# Altium PCB ewctrl-mini.pcbdoc
Units mil, origin at the board's own origin, x right, y up, seen from the top; angles counter-clockwise.
Board outline 5144.27 x 3985.28 mil, 2 copper layers (Top Layer, Bottom Layer); 67 components, 58 nets, 189 pads, 136 vias.
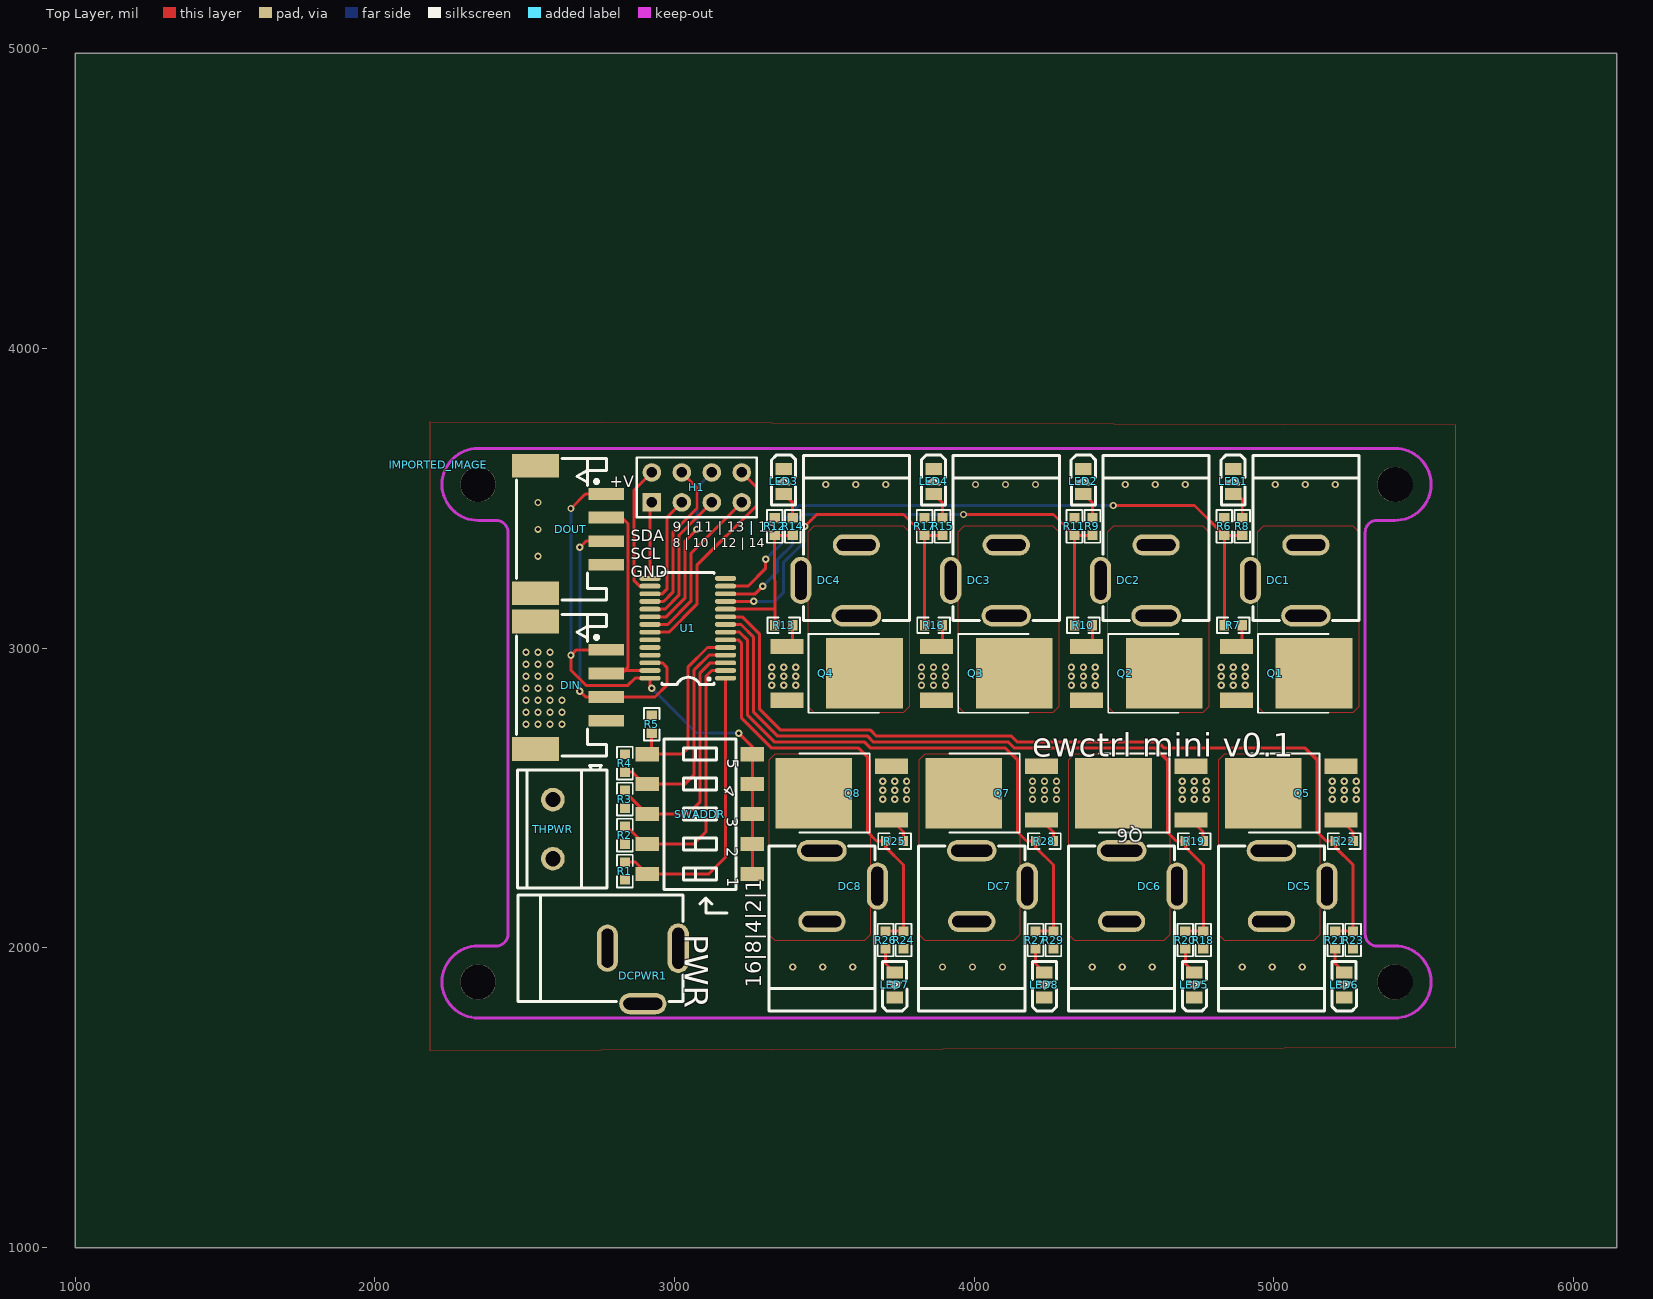
[diagram p0: Top Layer view]
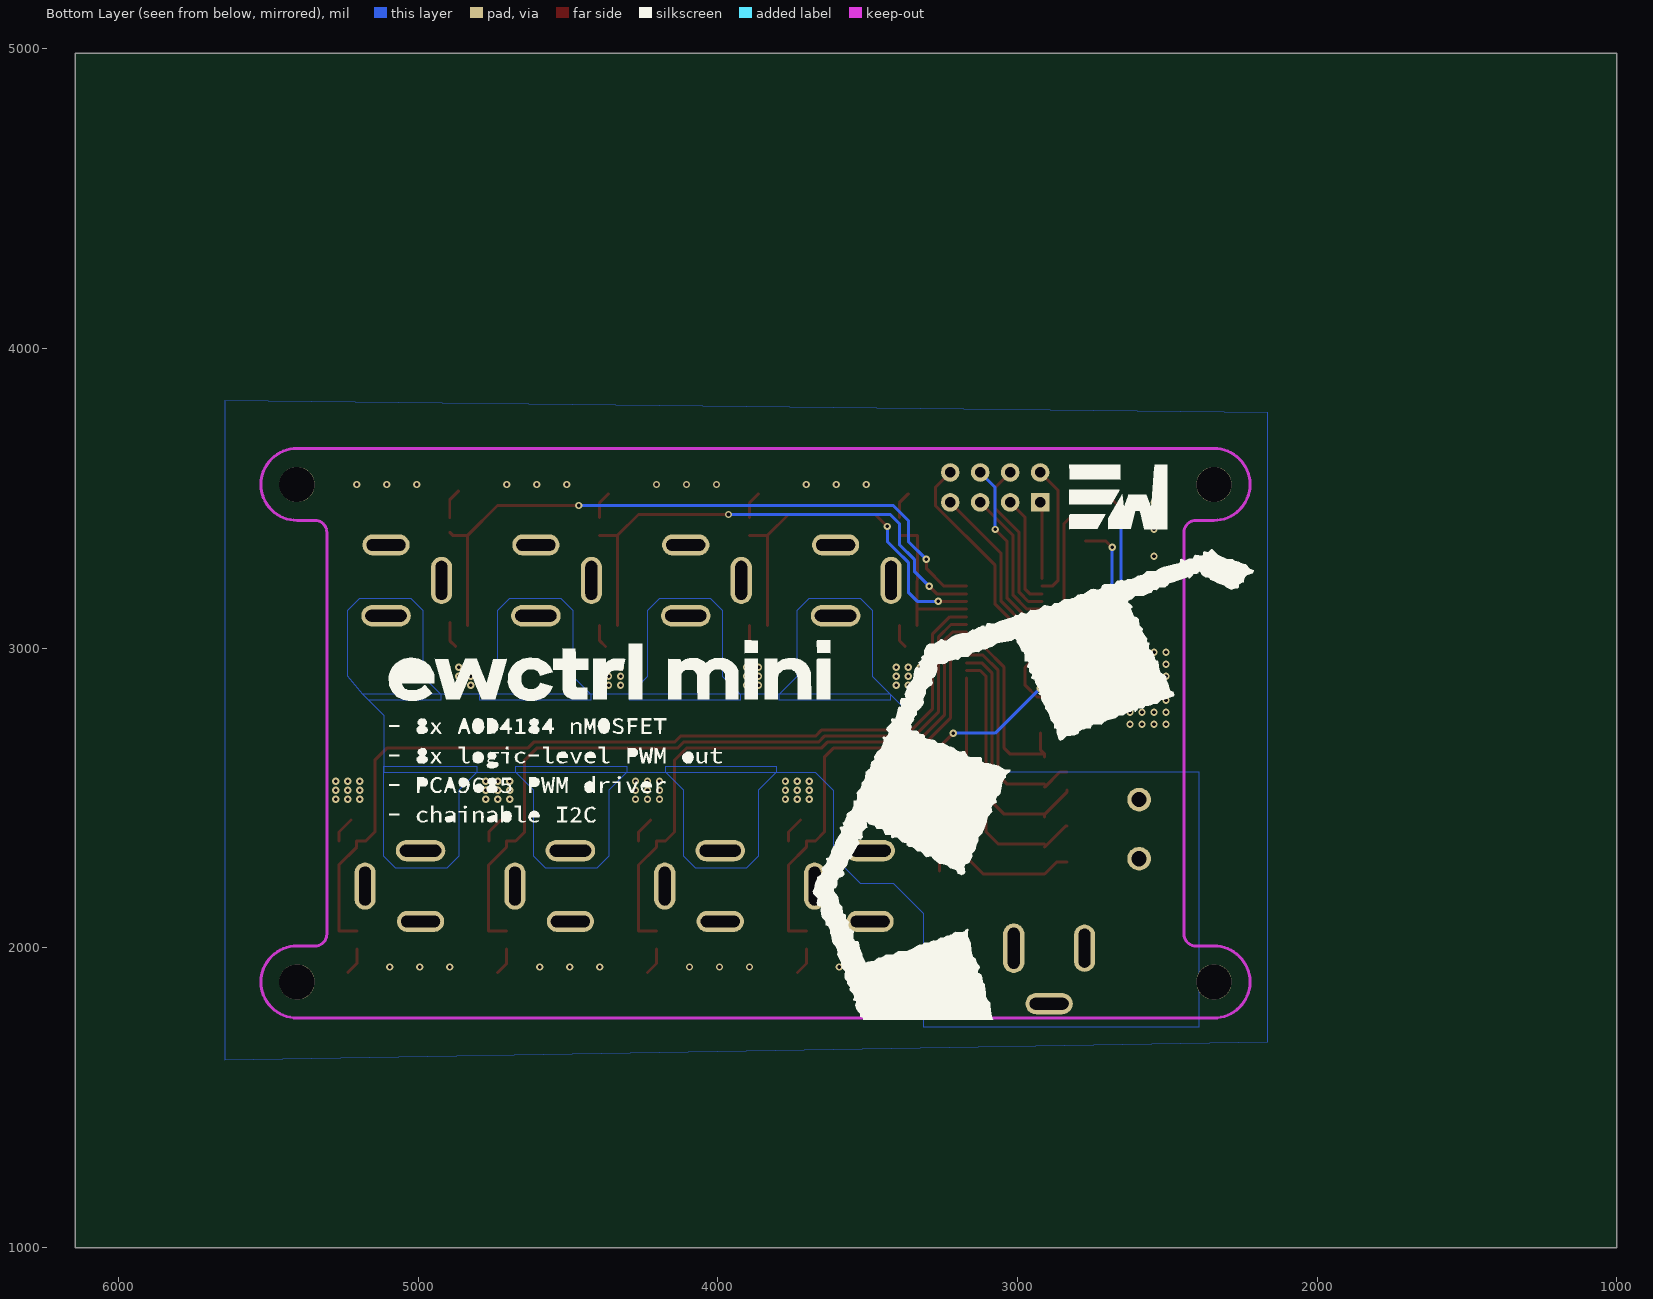
[diagram p1: Bottom Layer view, seen from below]

## Layer stack, top to bottom
Top Layer: signal copper (thickness not stored)
Dielectric: dielectric 12.6, FR-4, Dk 4.8
Bottom Layer: signal copper (thickness not stored)

## Board outline
6144.27,1000 1000,1000 1000,4985.28 6144.27,4985.28

## Components (designator, comment, footprint, x,y, rotation, side; value= is the part's Value field where it differs from the comment)
DC1 "DC-005-5A-2.0" DC-IN-TH_DC-005-5A-2.0 5014.27,3226.07 r270 top
DC2 "DC-005-5A-2.0" DC-IN-TH_DC-005-5A-2.0 4514.27,3226.07 r270 top
DC3 "DC-005-5A-2.0" DC-IN-TH_DC-005-5A-2.0 4014.28,3226.07 r270 top
DC4 "DC-005-5A-2.0" DC-IN-TH_DC-005-5A-2.0 3514.28,3226.07 r270 top
DC5 "DC-005-5A-2.0" DC-IN-TH_DC-005-5A-2.0 5084.27,2206.07 r90 top
DC6 "DC-005-5A-2.0" DC-IN-TH_DC-005-5A-2.0 4584.27,2206.07 r90 top
DC7 "DC-005-5A-2.0" DC-IN-TH_DC-005-5A-2.0 4084.27,2206.07 r90 top
DC8 "DC-005-5A-2.0" DC-IN-TH_DC-005-5A-2.0 3584.28,2206.07 r90 top
DCPWR1 "DC-005-5A-2.0" DC-IN-TH_DC-005-5A-2.0 2894.28,1906.07 r0 top
DIN "S4B-PH-SM4-K-TB(LF)(SN)" CONN-SMD_S4B-PH-SM4-K-TB-LF-SN 2654.28,2876.07 r90 top
DOUT "S4B-PH-SM4-K-TB(LF)(SN)" CONN-SMD_S4B-PH-SM4-K-TB-LF-SN 2654.28,3396.07 r90 top
H1 "HDR-F-2.54_2x4" HDR-F-2.54_2X4 3074.28,3536.07 r0 top
IMPORTED_IMAGE "IMPORTED_IMAGE" IMPORTED_IMAGE 2211.35,3611.05 r0 top
LED1 "whiteLEDSMD" LED0805-R-RD 4864.27,3556.07 r270 top
LED2 "whiteLEDSMD" LED0805-R-RD 4364.27,3556.07 r270 top
LED3 "whiteLEDSMD" LED0805-R-RD 3364.28,3556.07 r270 top
LED4 "whiteLEDSMD" LED0805-R-RD 3864.28,3556.07 r270 top
LED5 "whiteLEDSMD" LED0805-R-RD 4734.27,1876.08 r90 top
LED6 "whiteLEDSMD" LED0805-R-RD 5234.27,1876.08 r90 top
LED7 "whiteLEDSMD" LED0805-R-RD 3734.28,1876.08 r90 top
LED8 "whiteLEDSMD" LED0805-R-RD 4234.27,1876.08 r90 top
Q1 "AOD4184A" TO-252-2_L6.6-W6.1-P4.57-LS9.9-TL-CW 5004.27,2916.07 r0 top
Q2 "AOD4184A" TO-252-2_L6.6-W6.1-P4.57-LS9.9-TL-CW 4504.27,2916.07 r0 top
Q3 "AOD4184A" TO-252-2_L6.6-W6.1-P4.57-LS9.9-TL-CW 4004.28,2916.07 r0 top
Q4 "AOD4184A" TO-252-2_L6.6-W6.1-P4.57-LS9.9-TL-CW 3504.28,2916.07 r0 top
Q5 "AOD4184A" TO-252-2_L6.6-W6.1-P4.57-LS9.9-TL-CW 5094.27,2516.07 r180 top
Q6 "AOD4184A" TO-252-2_L6.6-W6.1-P4.57-LS9.9-TL-CW 4594.27,2516.07 r180 top
Q7 "AOD4184A" TO-252-2_L6.6-W6.1-P4.57-LS9.9-TL-CW 4094.27,2516.07 r180 top
Q8 "AOD4184A" TO-252-2_L6.6-W6.1-P4.57-LS9.9-TL-CW 3594.28,2516.07 r180 top
R1 "10kΩ" R0603 2834.28,2256.07 r270 top
R2 "10kΩ" R0603 2834.28,2376.07 r270 top
R3 "10kΩ" R0603 2834.28,2496.07 r270 top
R4 "10kΩ" R0603 2834.28,2616.07 r90 top
R5 "10kΩ" R0603 2924.28,2746.07 r90 top
R6 "10kΩ" R0603 4834.27,3406.07 r90 top
R7 "240Ω" R0603 4864.27,3076.07 r0 top
R8 "100Ω" R0603 4894.27,3406.07 r270 top
R9 "100Ω" R0603 4394.27,3406.07 r270 top
R10 "240Ω" R0603 4364.27,3076.07 r0 top
R11 "10kΩ" R0603 4334.27,3406.07 r90 top
R12 "10kΩ" R0603 3334.28,3406.07 r90 top
R13 "240Ω" R0603 3364.28,3076.07 r0 top
R14 "100Ω" R0603 3394.28,3406.07 r270 top
R15 "100Ω" R0603 3894.28,3406.07 r270 top
R16 "240Ω" R0603 3864.28,3076.07 r0 top
R17 "10kΩ" R0603 3834.28,3406.07 r90 top
R18 "10kΩ" R0603 4764.27,2026.08 r270 top
R19 "240Ω" R0603 4734.27,2356.07 r0 top
R20 "100Ω" R0603 4704.27,2026.08 r90 top
R21 "100Ω" R0603 5204.27,2026.08 r90 top
R22 "240Ω" R0603 5234.27,2356.07 r0 top
R23 "10kΩ" R0603 5264.27,2026.08 r270 top
R24 "10kΩ" R0603 3764.28,2026.08 r270 top
R25 "240Ω" R0603 3734.28,2356.07 r0 top
R26 "100Ω" R0603 3704.28,2026.08 r90 top
R27 "100Ω" R0603 4204.27,2026.08 r90 top
R28 "240Ω" R0603 4234.27,2356.07 r0 top
R29 "10kΩ" R0603 4264.27,2026.08 r270 top
SWADDR "DSIC05LS-P" SW-SMD_DSIC05LS-P 3084.28,2446.07 r90 top
THPWR "CONN-TH_2P-P5.00" CONN-TH_2P-P5.00 2594.28,2396.07 r270 top
U1 "-" TSSOP-28_L9.7-W4.4-P0.65-LS6.4-TL 3044.28,3066.07 r180 top
? "" ? 2166.57,3606.1 r0 top
? "" ? 2163.95,1826.1 r0 top
? "" ? 1973.14,2716.07 r0 top
? "" ? 3874.27,3927.17 r0 top
? "" ? 3874.28,4014.67 r0 top
? "" ? 2023.13,2716.07 r0 top

## Footprints (in the part's own frame and the unit in brackets; to place one, negate y for a bottom-side part, rotate by r counter-clockwise, add the part's x,y. Pads: shape width x height; smd on the part's side, far side on the other; paste and mask are expansions set on the pad)
CONN-SMD_S4B-PH-SM4-K-TB-LF-SN [mm]
  rect 1x3 smd paste+0 mask+0.051: 1(3.002,-3) 2(1,-3) 3(-1,-3) 4(-3,-3)
  rect 2x4 smd paste+0 mask+0.051: 5(-5.4,3) 6(5.4,3)
  silkscreen extent -6,-3 6,4.6
CONN-TH_2P-P5.00 [mm]
  round 2 hole 1.3 paste+0 mask+0.051: 1(-2.504,0) 2(2.504,0)
  silkscreen extent -5.4,-3 5,4.6
DC-IN-TH_DC-005-5A-2.0 [mm]
  oval 1.8x4.2 hole 1 slot 3.5 at 90 deg paste+0 mask+0.051: 1(3,2.352)
  oval 1.8x4 hole 1 slot 3.3 at 90 deg paste+0 mask+0.051: 2(-3,2.352)
  oval 4x1.8 hole 1 slot 3.3 at 0 deg paste+0 mask+0.051: 3(0,-2.352)
  silkscreen extent -10.6,-2.15 3.4,6.85
HDR-F-2.54_2X4 [mil]
  rect 62x62 hole 35 paste+0 mask+2: 1(-150,-50)
  round 62 hole 35 paste+0 mask+2: 2(-150,50) 3(-50,-50) 4(-50,50) 5(50,-50) 6(50,50) 7(150,-50) 8(150,50)
  silkscreen extent -200,-100 200,100
IMPORTED_IMAGE [mil]
LED0805-R-RD [mm]
  rect 1x1.4 smd paste+0 mask+0.051: 1(1.05,0) 2(-1.05,0)
  silkscreen extent -2.22,-1.04 1.99,1.01
R0603 [mil]
  rect 31.75x34.02 smd paste-3937.01 mask+2: 1(-29.65,0) 2(29.66,0)
  silkscreen extent -55,-26 55,26
SW-SMD_DSIC05LS-P [mm]
  rect 1.2x2 smd paste+0 mask+0.051: 1(-5.08,-4.45) 2(-2.54,-4.45) 3(0,-4.45) 4(2.54,-4.45) 5(5.08,-4.45) 6(5.08,4.45) 7(2.54,4.45) 8(0,4.45) 9(-2.54,4.45) 10(-5.08,4.45)
  silkscreen extent -6.37,-3.05 6.38,3.05
TO-252-2_L6.6-W6.1-P4.57-LS9.9-TL-CW [mm]
  rect 2.8x1.3 smd paste+0 mask+0.051: 1(-3.292,2.273) 3(-3.292,-2.273)
  rect 6.5x6 smd paste+0 mask+0.051: 2(3.292,0)
  silkscreen extent -1.46,-3.35 4.51,3.34
TSSOP-28_L9.7-W4.4-P0.65-LS6.4-TL [mil]
  oval 71x16 smd paste+0 mask+2: 1(-125.98,166.35) 2(-125.98,140.76) 3(-125.98,115.16) 4(-125.98,89.57) 5(-125.98,63.97) 6(-125.98,38.39) 7(-125.98,12.8) 8(-125.98,-12.8) 9(-125.98,-38.38) 10(-125.98,-63.97) 11(-125.98,-89.57) 12(-125.98,-115.15) 13(-125.98,-140.74) 14(-125.98,-166.34) 15(125.98,-166.34) 16(125.98,-140.74) 17(125.98,-115.15) 18(125.98,-89.57) 19(125.98,-63.97) 20(125.98,-38.38) 21(125.98,-12.8) 22(125.98,12.8) 23(125.98,38.39) 24(125.98,63.97) 25(125.98,89.57) 26(125.98,115.16) 27(125.98,140.74) 28(125.98,166.34)
  silkscreen extent -87,-187 87,187
? [mil]

## Free pads (board coordinates)
  round 118.11 hole 118.11 unplated paste+0: ""(2344.28,1886.08) ""(2344.28,3546.07) ""(5404.27,1886.08) ""(5404.27,3546.07)

## Via types
v1: diameter 24.41, hole 12.2, Top Layer to Bottom Layer, tented both sides, 136 vias

## Nets (pads, with @x,y where several pads share a name; then routed paths per layer and width w, separated by ;. In a path a pad name is that pad's centre, name@x,y a point inside that pad or via, vN(x,y) a via of type N, cw(c..) or ccw(c..) an arc to the next point about the centre after c; other vN are vias at no path point)
-OUT0: DC1.2 Q1.2
-OUT1: DC2.2 Q2.2
-OUT2: DC3.2 Q3.2
-OUT3: DC4.2 Q4.2
-OUT4: DC5.2 Q5.2
-OUT5: DC6.2 Q6.2
-OUT6: DC7.2 Q7.2
-OUT7: DC8.2 Q8.2
A0: R1.1 SWADDR.10 U1.1 | length 973.3
  Top Layer w10: R1.1 2869.43,2285.74 SWADDR.10 3114.28,2246.08 3170.26,2302.05 U1.1
A1: R2.1 SWADDR.9 U1.2 | length 908.9
  Top Layer w10: R2.1 2839.42,2405.74 SWADDR.9@2909.08,2336.07 ; SWADDR.9 3064.28,2346.08 3104.27,2386.07 3104.27,2905.32 3124.27,2925.32 U1.2
A2: R3.1 SWADDR.8 U1.3 | length 842.9
  Top Layer w10: R3.1@2834.28,2525.78 2834.28,2520.89 SWADDR.8 3044.28,2446.08 3084.27,2486.07 3084.27,2916.07 3119.12,2950.92 U1.3 ; SWADDR.8@2909.08,2436.08 SWADDR.8
A3: R4.1 SWADDR.7 U1.4 | length 740.1
  Top Layer w10: R4.1 2858.74,2586.42 SWADDR.7@2909.08,2536.07 ; SWADDR.7 3034.28,2546.08 3064.27,2576.07 3064.27,2926.07 3114.71,2976.51 U1.4
A4: R5.1 SWADDR.6 U1.5 | length 653
  Top Layer w10: SWADDR.6@2909.08,2636.07 SWADDR.6 ; R5.1@2923.94,2716.08 2923.94,2660.93 SWADDR.6 3024.28,2646.08 3044.27,2666.07 3044.27,2936.07 3110.3,3002.1 U1.5
GND: DCPWR1.2 DIN.4 DIN.5 DIN.6 DOUT.4 DOUT.5 DOUT.6 LED1.2 LED2.2 LED3.2 LED4.2 LED5.2 LED6.2 LED7.2 LED8.2 Q1.3 Q2.3 Q3.3 Q4.3 Q5.3 Q6.3 Q7.3 Q8.3 R1.2 R2.2 R3.2 R4.2 R5.2 R6.2 R11.2 R12.2 R17.2 R18.2 R23.2 R24.2 R29.2 THPWR.2 U1.14 U1.23 U1.24 U1.25
  other v1: 3394.28,1936.08 3494.28,1936.08 3594.28,1936.08 3894.28,1936.08 3994.28,1936.08 4094.28,1936.08 4394.28,1936.08 4494.28,1936.08 4594.28,1936.08 4894.28,1936.08 4994.27,1936.08 5094.27,1936.08 3694.28,2496.08 3734.28,2496.08 3774.28,2496.08 4194.28,2496.08 4234.28,2496.08 4274.28,2496.08 4694.27,2496.08 4734.27,2496.08 4774.27,2496.08 5194.27,2496.08 5234.27,2496.08 5274.27,2496.08 3694.28,2526.08 3734.28,2526.08 3774.28,2526.08 4194.28,2526.08 4234.28,2526.08 4274.28,2526.08 4694.27,2526.08 4734.27,2526.08 4774.27,2526.08 5194.27,2526.08 5234.27,2526.08 5274.27,2526.08 3694.28,2556.08 3734.28,2556.08 3774.28,2556.08 4194.28,2556.08 4234.28,2556.08 4274.28,2556.08 4694.27,2556.08 4734.27,2556.08 4774.27,2556.08 5194.27,2556.08 5234.27,2556.08 5274.27,2556.08 2504.28,2746.08 2544.28,2746.08 2584.28,2746.08 2624.28,2746.08 2504.28,2786.08 2544.28,2786.08 2584.28,2786.08 2624.28,2786.08 2504.28,2826.08 2544.28,2826.08 2584.28,2826.08 2624.28,2826.08 2504.28,2866.07 2544.28,2866.07 2584.28,2866.07 3324.28,2876.07 3364.28,2876.07 3404.28,2876.07 3824.28,2876.07 3864.28,2876.07 3904.28,2876.07 4324.28,2876.07 4364.28,2876.07 4404.28,2876.07 4824.27,2876.07 4864.27,2876.07 4904.27,2876.07 2504.28,2906.07 2544.28,2906.07 2584.28,2906.07 3324.28,2906.07 3364.28,2906.07 3404.28,2906.07 3824.28,2906.07 3864.28,2906.07 3904.28,2906.07 4324.28,2906.07 4364.28,2906.07 4404.28,2906.07 4824.27,2906.07 4864.27,2906.07 4904.27,2906.07 3324.28,2936.07 3364.28,2936.07 3404.28,2936.07 3824.28,2936.07 3864.28,2936.07 3904.28,2936.07 4324.28,2936.07 4364.28,2936.07 4404.28,2936.07 4824.27,2936.07 4864.27,2936.07 4904.27,2936.07 2504.28,2946.07 2544.28,2946.07 2584.28,2946.07 2504.28,2986.07 2544.28,2986.07 2584.28,2986.07 2544.28,3306.07 2544.28,3396.07 2544.28,3486.07 3504.28,3546.07 3604.28,3546.07 3704.28,3546.07 4004.28,3546.07 4104.28,3546.07 4204.28,3546.07 4504.28,3546.07 4604.28,3546.07 4704.27,3546.07 5004.27,3546.07 5104.27,3546.07 5204.27,3546.07
LED1_1: LED1.1 R8.1 | length 101.4
  Top Layer w10: LED1.1@4864.27,3524.72 4894.27,3494.72 R8.1
LED3_1: LED3.1 R14.1 | length 91.4
  Top Layer w10: LED3.1 3394.28,3484.72 R14.1
LED5_1: LED5.1 R20.1 | length 91.4
  Top Layer w10: R20.1 4704.27,1947.42 LED5.1
LED7_1: LED7.1 R26.1 | length 91.4
  Top Layer w10: R26.1 3704.28,1947.42 LED7.1
OUT0: DC1.1 DC2.1 DC3.1 DC4.1 DC5.1 DC6.1 DC7.1 DC8.1 DCPWR1.1 THPWR.1
Q1_1: Q1.1 R7.2 | length 88.5
  Top Layer w10: Q1.1@4874.67,3005.55 4893.93,3024.81 R7.2@4893.93,3086.07
R9_1: LED2.1 R9.1 | length 91.4
  Top Layer w10: LED2.1 4394.27,3484.72 R9.1
R10_2: Q2.1 R10.2 | length 78.5
  Top Layer w10: Q2.1 4393.93,3024.82 R10.2
R13_2: Q4.1 R13.2 | length 78.5
  Top Layer w10: Q4.1 3393.94,3024.82 R13.2
R15_1: LED4.1 R15.1 | length 91.4
  Top Layer w10: LED4.1 3894.28,3484.72 R15.1
R16_2: Q3.1 R16.2 | length 78.5
  Top Layer w10: Q3.1 3893.93,3024.82 R16.2
R19_2: Q6.1 R19.2 | length 87.1
  Top Layer w10: Q6.1 4763.93,2386.54 R19.2
R21_1: LED6.1 R21.1 | length 91.4
  Top Layer w10: R21.1 5204.27,1947.42 LED6.1
R22_2: Q5.1 R22.2 | length 87.1
  Top Layer w10: Q5.1 5263.93,2386.54 R22.2
R25_2: Q8.1 R25.2 | length 87.1
  Top Layer w10: Q8.1 3763.93,2386.54 R25.2
R27_1: LED8.1 R27.1 | length 91.4
  Top Layer w10: R27.1 4204.27,1947.42 LED8.1
R28_2: Q7.1 R28.2 | length 87.1
  Top Layer w10: Q7.1 4263.93,2386.54 R28.2
S$67920: 
S$67927: 
S$68189: 
S$68193: 
S$68197: 
S$68201: 
S$68322: 
S$68326: 
SCL: DIN.3 DOUT.3 U1.26 | length 1013.2
  Top Layer w10: v1(2684.28,2856.07) 2703.65,2836.7 DIN.3 2934.88,2836.68 2974.28,2876.08 2974.28,2936.08 2959.48,2950.88 U1.26 ; v1(2684.28,3336.07) 2704.91,3356.7 DOUT.3
  Bottom Layer w10: v1(2684.28,2856.07) v1(2684.28,3336.07)
SDA: DIN.2 DOUT.2 U1.27 | length 790.4
  Top Layer w10: DIN.2 2782.29,2925.33 U1.27 ; DIN.2@2772.38,2915.48 2823.68,2915.48 2844.28,2936.08 2844.28,3416.08 2824.88,3435.48 DOUT.2@2772.38,3435.48
TRIG0: R6.1 R7.1 R8.2 U1.13 | length 2240
  Top Layer w10: U1.13 3245.02,3206.82 3304.27,3266.07 v1(3304.28,3296.07) ; v1(4464.28,3476.07) 4734.6,3476.07 R6.1 ; R7.1 4834.27,3076.41 R6.1 ; R8.2@4894.27,3386.41 4884.27,3376.41 R6.1
  Bottom Layer w10: v1(3304.28,3296.07) 3364.28,3356.08 3364.28,3426.08 3414.28,3476.08 v1(4464.28,3476.07)
TRIG1: R9.2 R10.1 R11.1 U1.12 | length 1727.3
  Top Layer w10: U1.12 3269.44,3181.23 v1(3294.28,3206.07) ; v1(3964.28,3446.07) 4264.61,3446.07 R11.1 ; R10.1 R11.1 R9.2
  Bottom Layer w10: v1(3294.28,3206.07) 3344.27,3256.06 3344.27,3296.07 3394.27,3346.07 3394.27,3416.07 3424.27,3446.07 v1(3964.28,3446.07)
TRIG2: R15.2 R16.1 R17.1 U1.11 | length 1261.3
  Top Layer w10: U1.11 3170.69,3156.07 v1(3264.28,3156.07) ; v1(3434.28,3406.07) 3474.28,3446.08 3764.28,3446.08 R17.1 ; R16.1 R17.1 ; R15.2 R17.1
  Bottom Layer w10: v1(3264.28,3156.07) 3334.27,3156.07 3364.27,3186.07 3364.27,3286.07 3404.27,3326.07 3434.27,3356.07 v1(3434.28,3406.07)
TRIG3: R12.1 R13.1 R14.2 U1.10 | length 524.6
  Top Layer w10: U1.10 3334.52,3130.05 ; R13.1 R12.1 R14.2
TRIG4: R21.2 R22.1 R23.1 U1.9 | length 3016.4
  Top Layer w10: U1.9 3225.89,3104.46 3284.28,3046.07 3284.28,2796.07 3354.28,2726.07 3654.28,2726.07 3674.28,2706.07 4124.27,2706.07 4144.27,2686.07 4614.27,2686.07 4634.27,2666.07 5104.27,2666.07 5144.27,2626.07 5144.27,2386.07 5174.27,2356.07 R22.1 5204.61,2335.73 5264.27,2276.07 R23.1 R21.2
TRIG5: R18.1 R19.1 R20.2 U1.8 | length 2505.8
  Top Layer w10: U1.8 3221.48,3078.88 3264.28,3036.08 3264.28,2786.08 3344.28,2706.08 3644.28,2706.08 3664.28,2686.08 4114.28,2686.08 4134.28,2666.08 4604.28,2666.08 4644.28,2626.08 4644.28,2386.08 4674.28,2356.08 R19.1 ; R20.2 R18.1 4764.27,2276.07 4704.61,2335.73 R19.1
TRIG6: R27.2 R28.1 R29.1 U1.7 | length 1995.2
  Top Layer w10: U1.7 3217.08,3053.28 3244.28,3026.08 3244.28,2776.08 3334.28,2686.08 3634.28,2686.08 3654.28,2666.08 4104.28,2666.08 4144.28,2626.08 4144.28,2386.08 4174.28,2356.08 R28.1 ; R27.2 R29.1 4264.27,2276.07 4204.61,2335.73 R28.1
TRIG7: R24.1 R25.1 R26.2 U1.6 | length 1490.4
  Top Layer w10: U1.6 3212.68,3027.68 3224.28,3016.08 3224.28,2766.08 3324.28,2666.08 3614.28,2666.08 3644.28,2636.08 3644.28,2386.08 3674.28,2356.08 R25.1 ; R26.2 R24.1 3764.28,2276.07 3704.61,2335.73 R25.1
TRIG8: H1.1 U1.15 | length 256.1
  Top Layer w10: U1.15 2918.3,3480.09 H1.1
TRIG9: H1.2 U1.16 | length 446.8
  Top Layer w10: U1.16 2883.53,3206.82 2864.28,3226.07 2864.28,3526.07 H1.2
TRIG10: H1.3 U1.17 | length 372.9
  Top Layer w10: U1.17 2959.38,3181.18 2974.28,3196.08 2974.28,3436.08 H1.3
TRIG11: H1.4 U1.18 | length 542.4
  Top Layer w10: U1.18@2918.28,3155.68 2963.88,3155.68 2994.28,3186.08 2994.28,3386.08 3074.28,3466.08 3074.28,3536.08 H1.4
TRIG12: H1.5 U1.19 | length 470.6
  Top Layer w10: U1.19@2918.28,3130.08 2968.28,3130.08 3014.28,3176.08 3014.28,3376.08 H1.5
TRIG13: H1.6 U1.20 | length 598.8
  Top Layer w10: U1.20 2972.68,3104.48 3034.28,3166.08 3034.28,3356.08 v1(3074.28,3396.07)
  Bottom Layer w10: v1(3074.28,3396.07) 3074.28,3536.07 H1.6
TRIG14: H1.7 U1.21 | length 568.4
  Top Layer w10: U1.21 2977.08,3078.88 3054.28,3156.08 3054.28,3316.08 H1.7
TRIG15: H1.8 U1.22 | length 738
  Top Layer w10: U1.22 2981.48,3053.28 3074.28,3146.08 3074.28,3276.08 3274.28,3476.08 3274.28,3536.08 H1.8
VCC: DIN.1 DOUT.1 SWADDR.1 SWADDR.2 SWADDR.3 SWADDR.4 SWADDR.5 U1.28 | length 1965.2
  Top Layer w10: v1(2654.28,3466.07) 2702.47,3514.26 DOUT.1 ; DIN.1 2672.48,2994.28 v1(2654.28,2976.08) 2654.28,2926.08 2704.28,2876.08 2844.28,2876.08 2867.98,2899.78 U1.28@2918.28,2899.78 ; U1.28 2918.3,2872.05 v1(2924.28,2866.07) ; v1(3214.28,2716.08) 3259.47,2670.88 SWADDR.5 SWADDR.1@3259.47,2256.08
  Bottom Layer w10: v1(2654.28,2976.08) v1(2654.28,3466.07) ; v1(2924.28,2866.07) 3074.27,2716.07 v1(3214.28,2716.08)
pads on no net: DC1.3 DC2.3 DC3.3 DC4.3 DC5.3 DC6.3 DC7.3 DC8.3 DCPWR1.3

## Polygon pours and split planes (outlines as drawn)
GND on Bottom Layer (solid): 2164.28,3786.07 5644.27,3826.07 5644.27,1626.08 2164.28,1686.08
OUT0 on Bottom Layer (solid): 3424.28,2846.07 3964.28,2846.07 5184.27,2846.07 5114.27,2776.07 5114.27,2586.07 3674.28,2586.07 3614.28,2526.07 3614.28,2306.07 3524.28,2216.07 3414.28,2216.07 3314.28,2116.07 3314.28,1736.08 2394.28,1736.08 2394.28,2586.07 3224.28,2586.07 3374.28,2746.07 3374.28,2796.07
OUT0 on Bottom Layer (solid): 3524.28,3166.07 3484.28,3126.07 3484.28,2906.07 3424.28,2846.07 3424.28,2826.07 3794.28,2826.07 3794.28,2846.07 3734.28,2906.07 3734.28,3126.07 3694.28,3166.07 3554.28,3166.07
OUT0 on Bottom Layer (solid): 5074.27,2266.07 5114.27,2306.07 5114.27,2586.07 5114.27,2606.07 4804.27,2606.07 4804.27,2586.07 4864.27,2526.07 4864.27,2306.07 4904.27,2266.07 5044.27,2266.07
OUT0 on Bottom Layer (solid): 4024.27,3166.07 3984.28,3126.07 3984.28,2906.07 3924.28,2846.07 3924.28,2826.07 4294.27,2826.07 4294.27,2846.07 4234.27,2906.07 4234.27,3126.07 4194.27,3166.07 4054.27,3166.07
OUT0 on Bottom Layer (solid): 4524.27,3166.07 4484.27,3126.07 4484.27,2906.07 4424.27,2846.07 4424.27,2826.07 4794.27,2826.07 4794.27,2846.07 4734.27,2906.07 4734.27,3126.07 4694.27,3166.07 4554.27,3166.07
OUT0 on Bottom Layer (solid): 5024.27,3166.07 4984.27,3126.07 4984.27,2906.07 4924.27,2846.07 4924.27,2826.07 5164.27,2826.07 5184.27,2846.07 5234.27,2906.07 5234.27,3126.07 5194.27,3166.07 5054.27,3166.07
OUT0 on Bottom Layer (solid): 4074.28,2266.07 4114.27,2306.07 4114.27,2526.07 4174.27,2586.07 4174.27,2606.07 3804.28,2606.07 3804.28,2586.07 3864.28,2526.07 3864.28,2306.07 3904.28,2266.07 4044.28,2266.07
OUT0 on Bottom Layer (solid): 4574.27,2266.07 4614.27,2306.07 4614.27,2526.07 4674.27,2586.07 4674.27,2606.07 4304.27,2606.07 4304.27,2586.07 4364.27,2526.07 4364.27,2306.07 4404.27,2266.07 4544.27,2266.07
-OUT0 on Top Layer (solid): 4944.27,3386.07 4944.27,2806.07 4964.27,2786.07 5264.27,2786.07 5284.27,2806.07 5284.27,3386.07 5264.27,3406.07 4964.27,3406.07
-OUT1 on Top Layer (solid): 4444.27,3386.07 4444.27,2806.07 4464.27,2786.07 4764.27,2786.07 4784.27,2806.07 4784.27,3386.07 4764.27,3406.07 4464.27,3406.07
-OUT2 on Top Layer (solid): 3944.28,3386.07 3944.28,2806.07 3964.28,2786.07 4264.27,2786.07 4284.27,2806.07 4284.27,3386.07 4264.27,3406.07 3964.28,3406.07
-OUT3 on Top Layer (solid): 3444.28,3386.07 3444.28,2806.07 3464.28,2786.07 3764.28,2786.07 3784.28,2806.07 3784.28,3386.07 3764.28,3406.07 3464.28,3406.07
GND on Top Layer (solid): 2184.28,3756.07 5604.27,3746.07 5604.27,1666.08 2184.28,1656.08
-OUT7 on Top Layer (solid): 3654.28,2046.08 3654.28,2626.07 3634.28,2646.07 3334.28,2646.07 3314.28,2626.07 3314.28,2046.08 3334.28,2026.08 3634.28,2026.08
-OUT6 on Top Layer (solid): 4154.27,2046.08 4154.27,2626.07 4134.27,2646.07 3834.28,2646.07 3814.28,2626.07 3814.28,2046.08 3834.28,2026.08 4134.27,2026.08
-OUT5 on Top Layer (solid): 4654.27,2046.08 4654.27,2626.07 4634.27,2646.07 4334.27,2646.07 4314.27,2626.07 4314.27,2046.08 4334.27,2026.08 4634.27,2026.08
-OUT4 on Top Layer (solid): 5154.27,2046.08 5154.27,2626.07 5134.27,2646.07 4834.27,2646.07 4814.27,2626.07 4814.27,2046.08 4834.27,2026.08 5134.27,2026.08

## Keep-outs
Keep-Out Layer:
  lines w10: 2404.28,2006.08 ccw(c2404.28,2046.08) 2444.28,2046.08 ; 2404.28,3426.07 cw(c2404.28,3386.07) 2444.28,3386.07 ; 5304.27,2046.08 ccw(c5344.27,2046.08) 5344.27,2006.08 ; 5304.27,3386.07 cw(c5344.27,3386.07) 5344.27,3426.07
  lines w10 net S$67920: 2344.28,1766.07 cw(c2344.28,1886.07) 2344.28,2006.07 ; 2344.28,3426.07 cw(c2344.28,3546.07) 2344.28,3666.07 ; 5404.27,1766.07 ccw(c5404.27,1886.07) 5404.27,2006.07 ; 5404.27,3426.07 ccw(c5404.27,3546.07) 5404.27,3666.07

## Silkscreen, mask and mechanical layers (free items; w line width, h text height)
Top Overlay:
  lines w10 net S$68322: 3084.28,2146.07 3104.28,2166.07 3104.28,2116.07 3174.28,2116.07
  lines w10 net S$68326: 3104.28,2166.07 3124.28,2146.07
  text "+V" at 2784.28,3536.38 h39.37
  text "9 | 11 | 13 | 15" at 2994.28,3376.07 h59.05
  text "SDA" at 2854.28,3356.38 h39.37
  text "8 | 10 | 12 | 14" at 2994.28,3326.07 h51.18
  text "SCL" at 2854.28,3296.38 h39.37
  text "GND" at 2854.28,3236.38 h39.37
  text "ewctrl mini v0.1" at 4194.28,2636.71 h78.74
  text "PWR" at 3034.91,2046.08 h78.74 r270
  text "16|8|4|2|1" at 3289.87,1866.08 h51.18 r90

## Text inside footprints (layer, text, board x,y; h text height)
SWADDR: Top Overlay "1" at 3175.39,2236.08 h39.37 r270; Top Overlay "2" at 3174.59,2336.08 h39.37 r270; Top Overlay "3" at 3174.59,2436.08 h39.37 r270; Top Overlay "4" at 3179.15,2547.65 h39.37 r234; Top Overlay "5" at 3175.39,2631.08 h39.37 r270